# Altium PCB 2012_BALISE_CONNECTIQUE_FILLE.PCBDOC
Units mm, origin at the board's own origin, x right, y up, seen from the top; angles counter-clockwise.
Board outline 40 x 37 mm, 4 copper layers (1-TOP, 2-Signal, 3-GND, 4-BOT); 17 components, 14 nets, 57 pads, 29 vias.
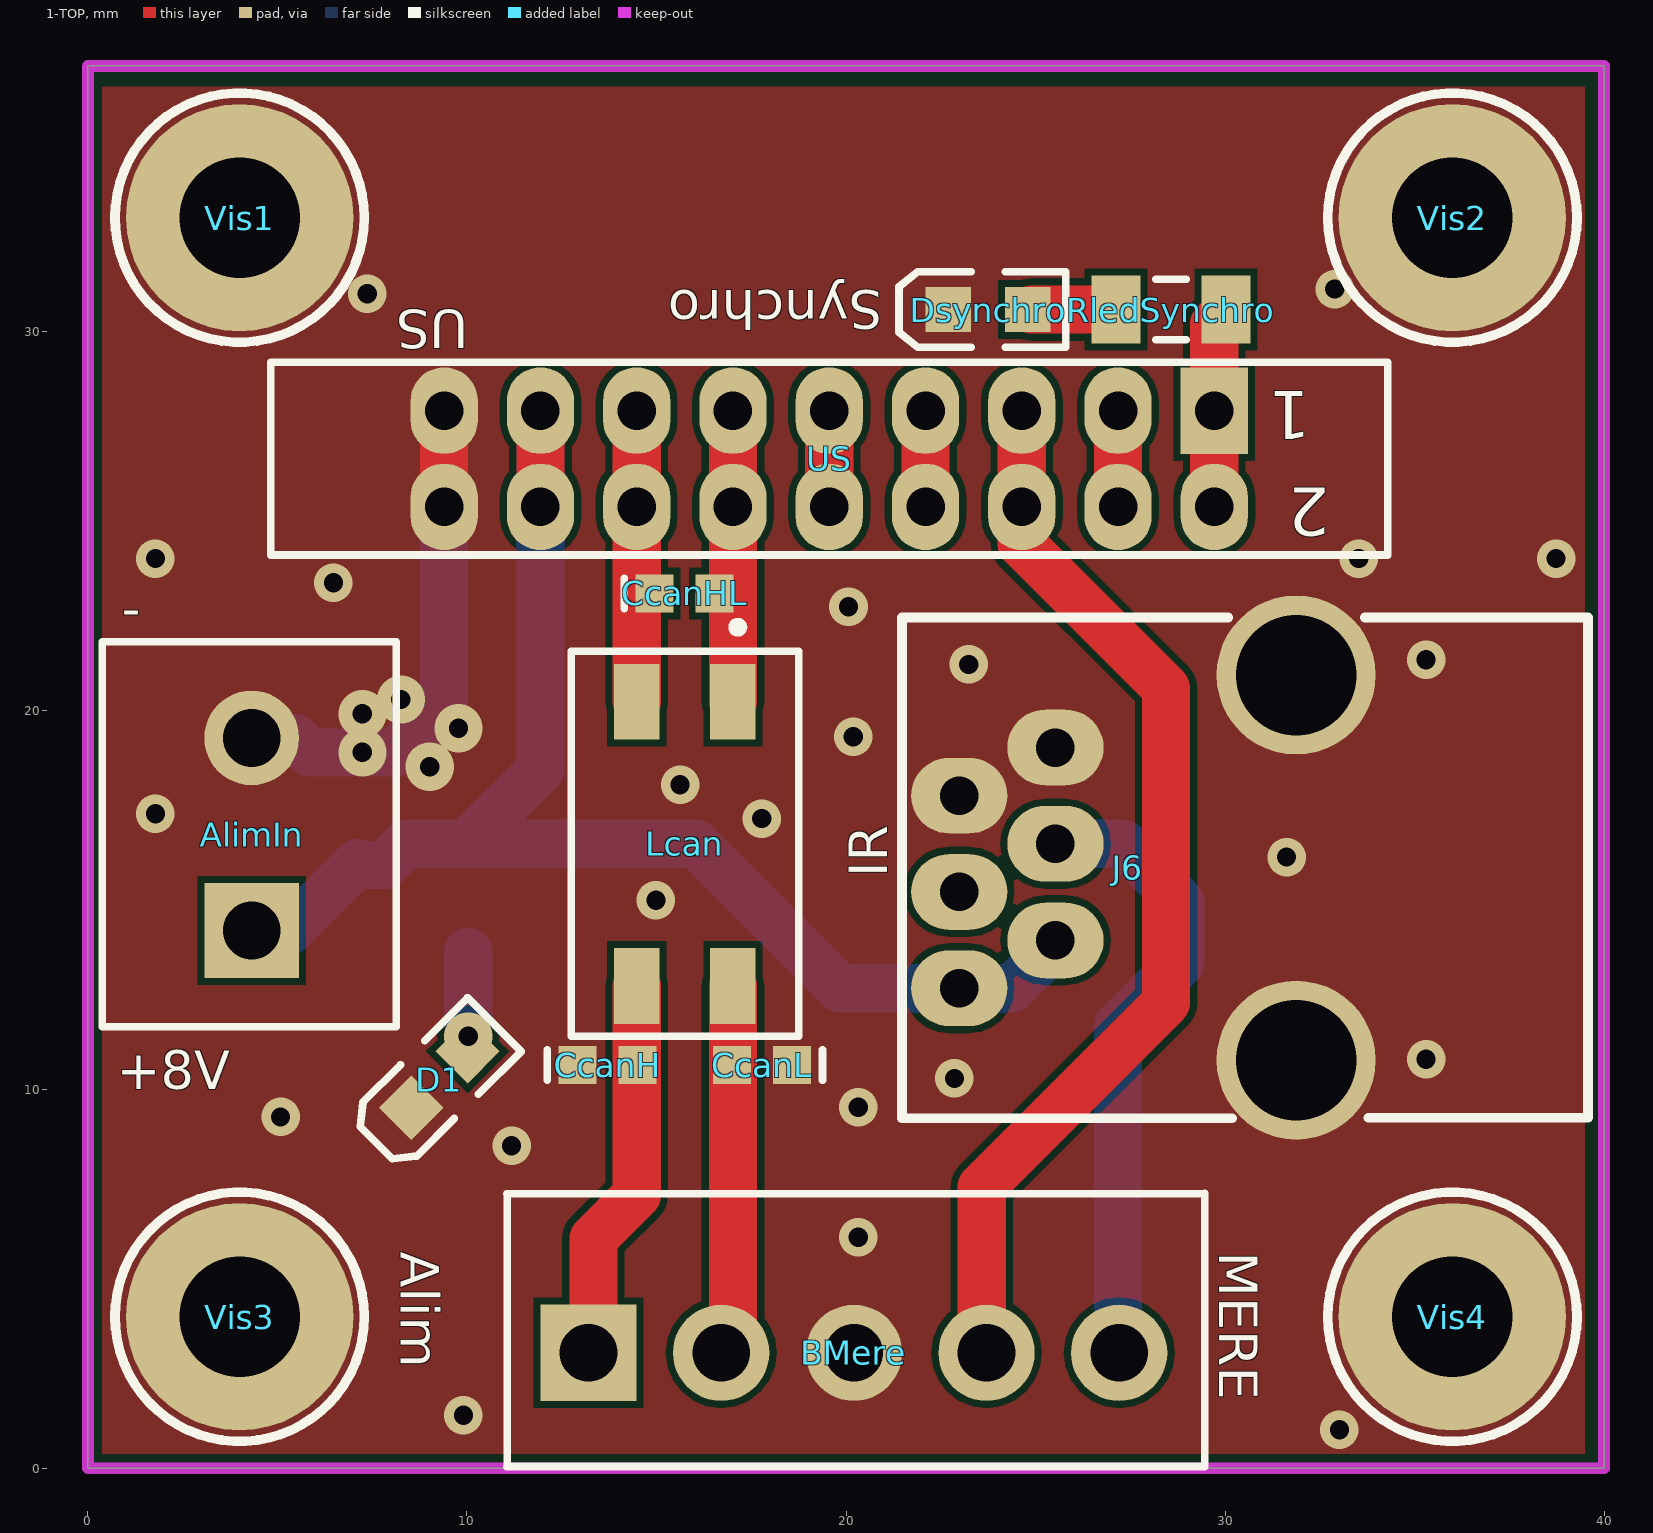
[diagram p0: 1-TOP view]
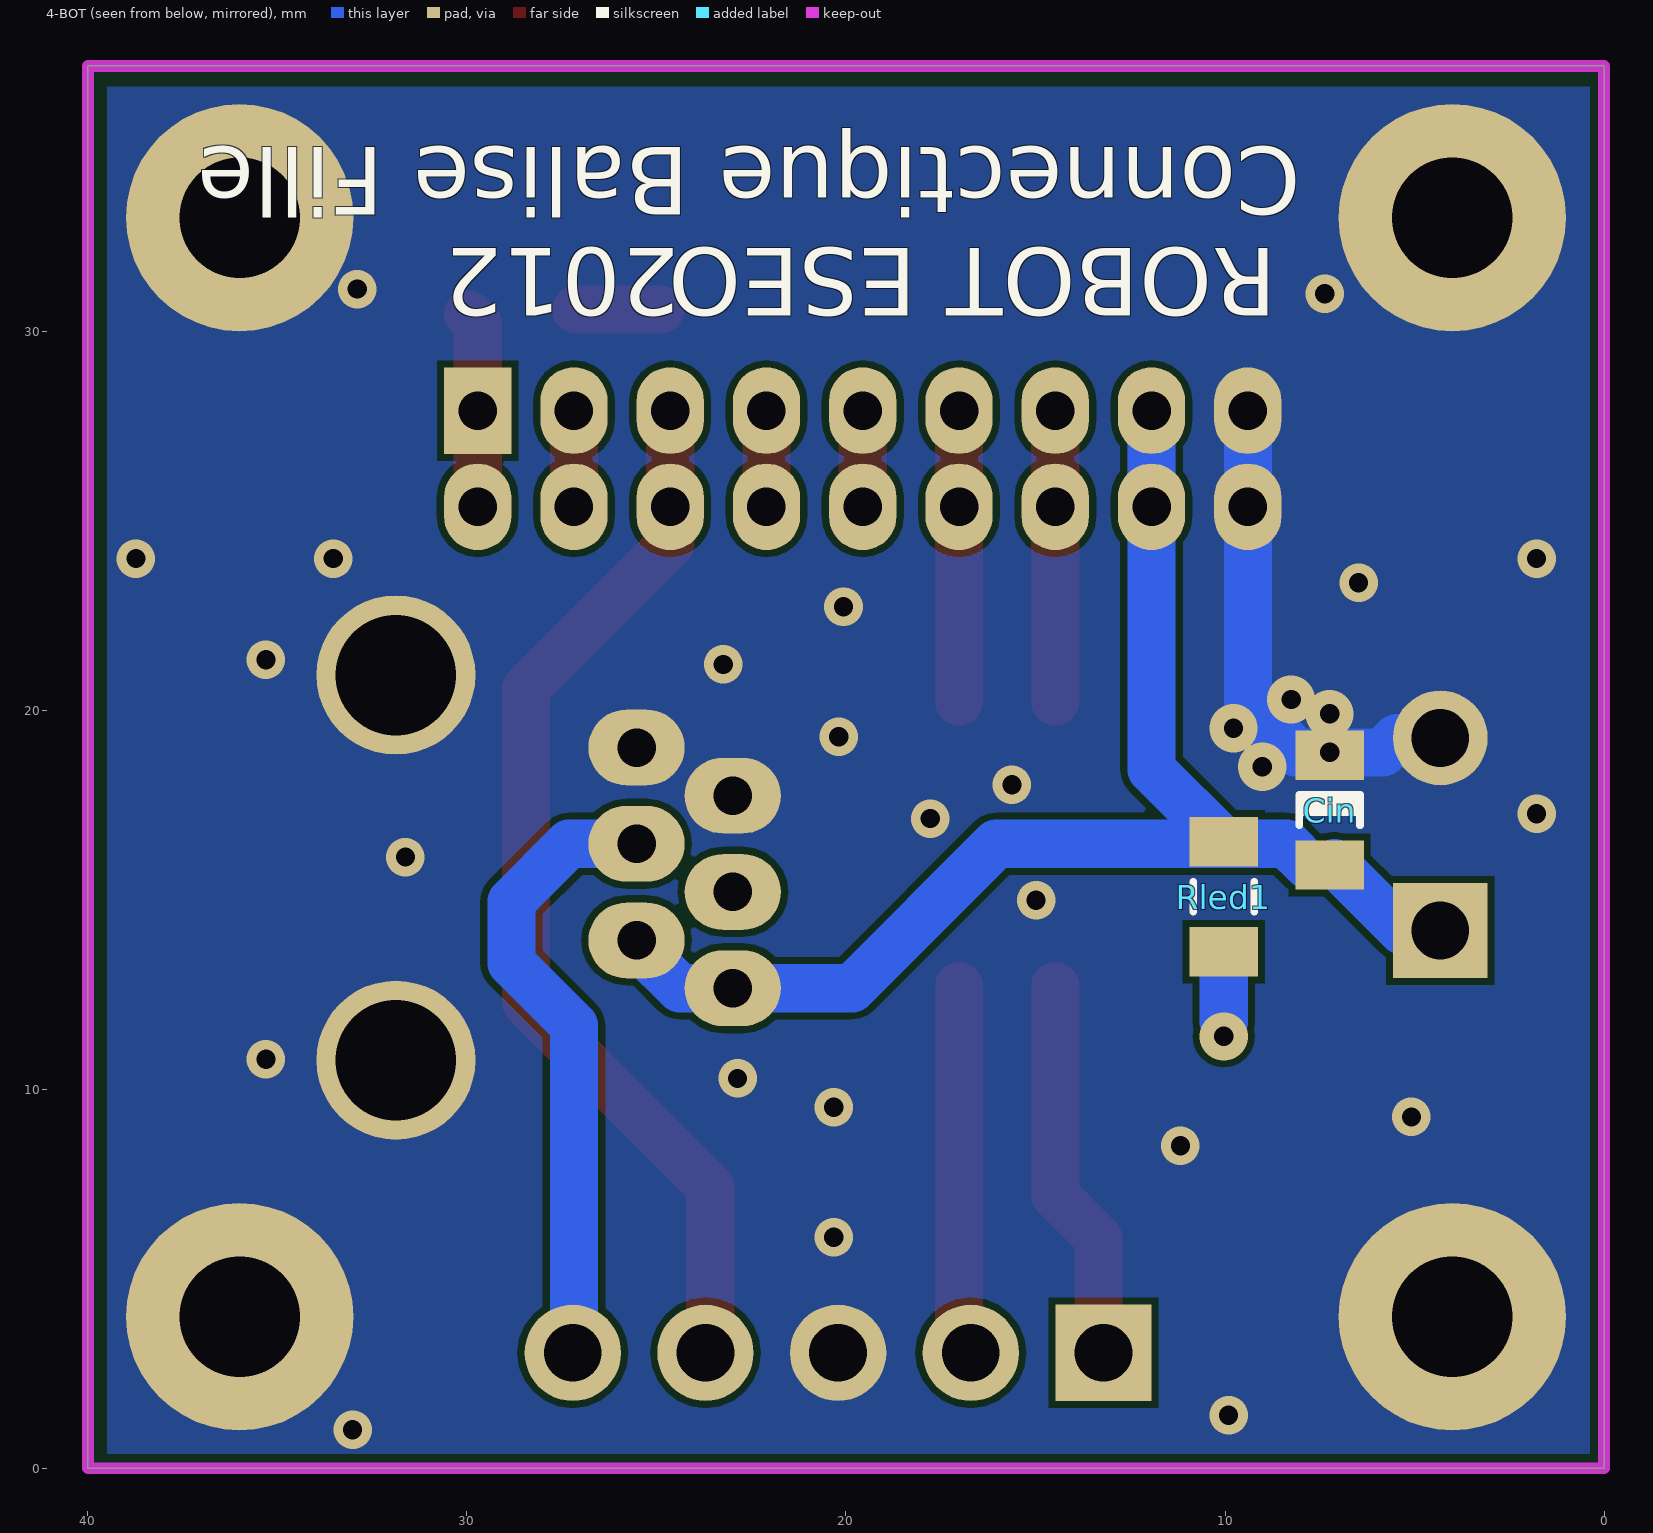
[diagram p1: 4-BOT view, seen from below]
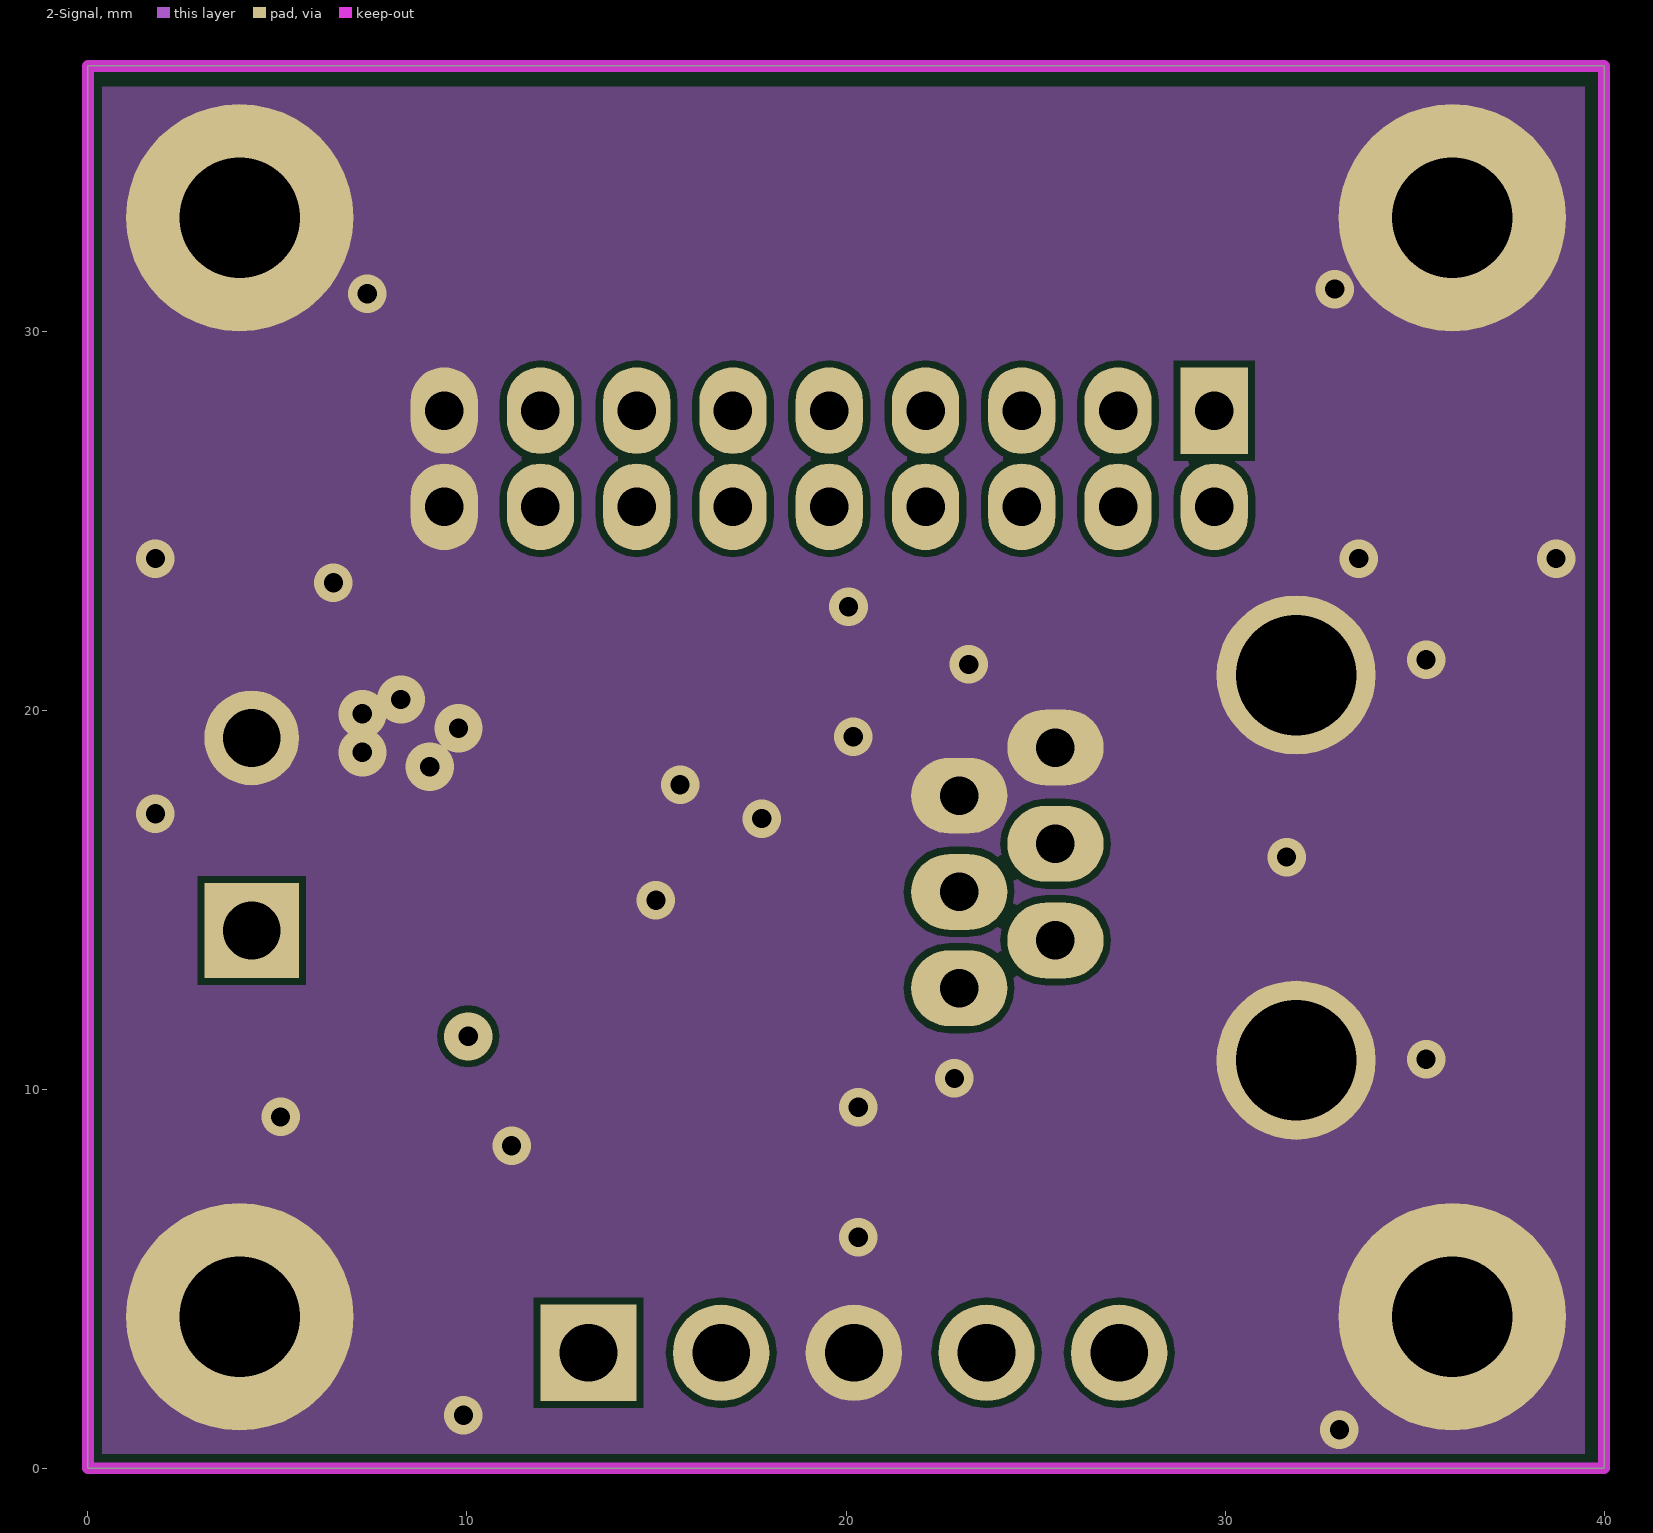
[diagram p2: 2-Signal]
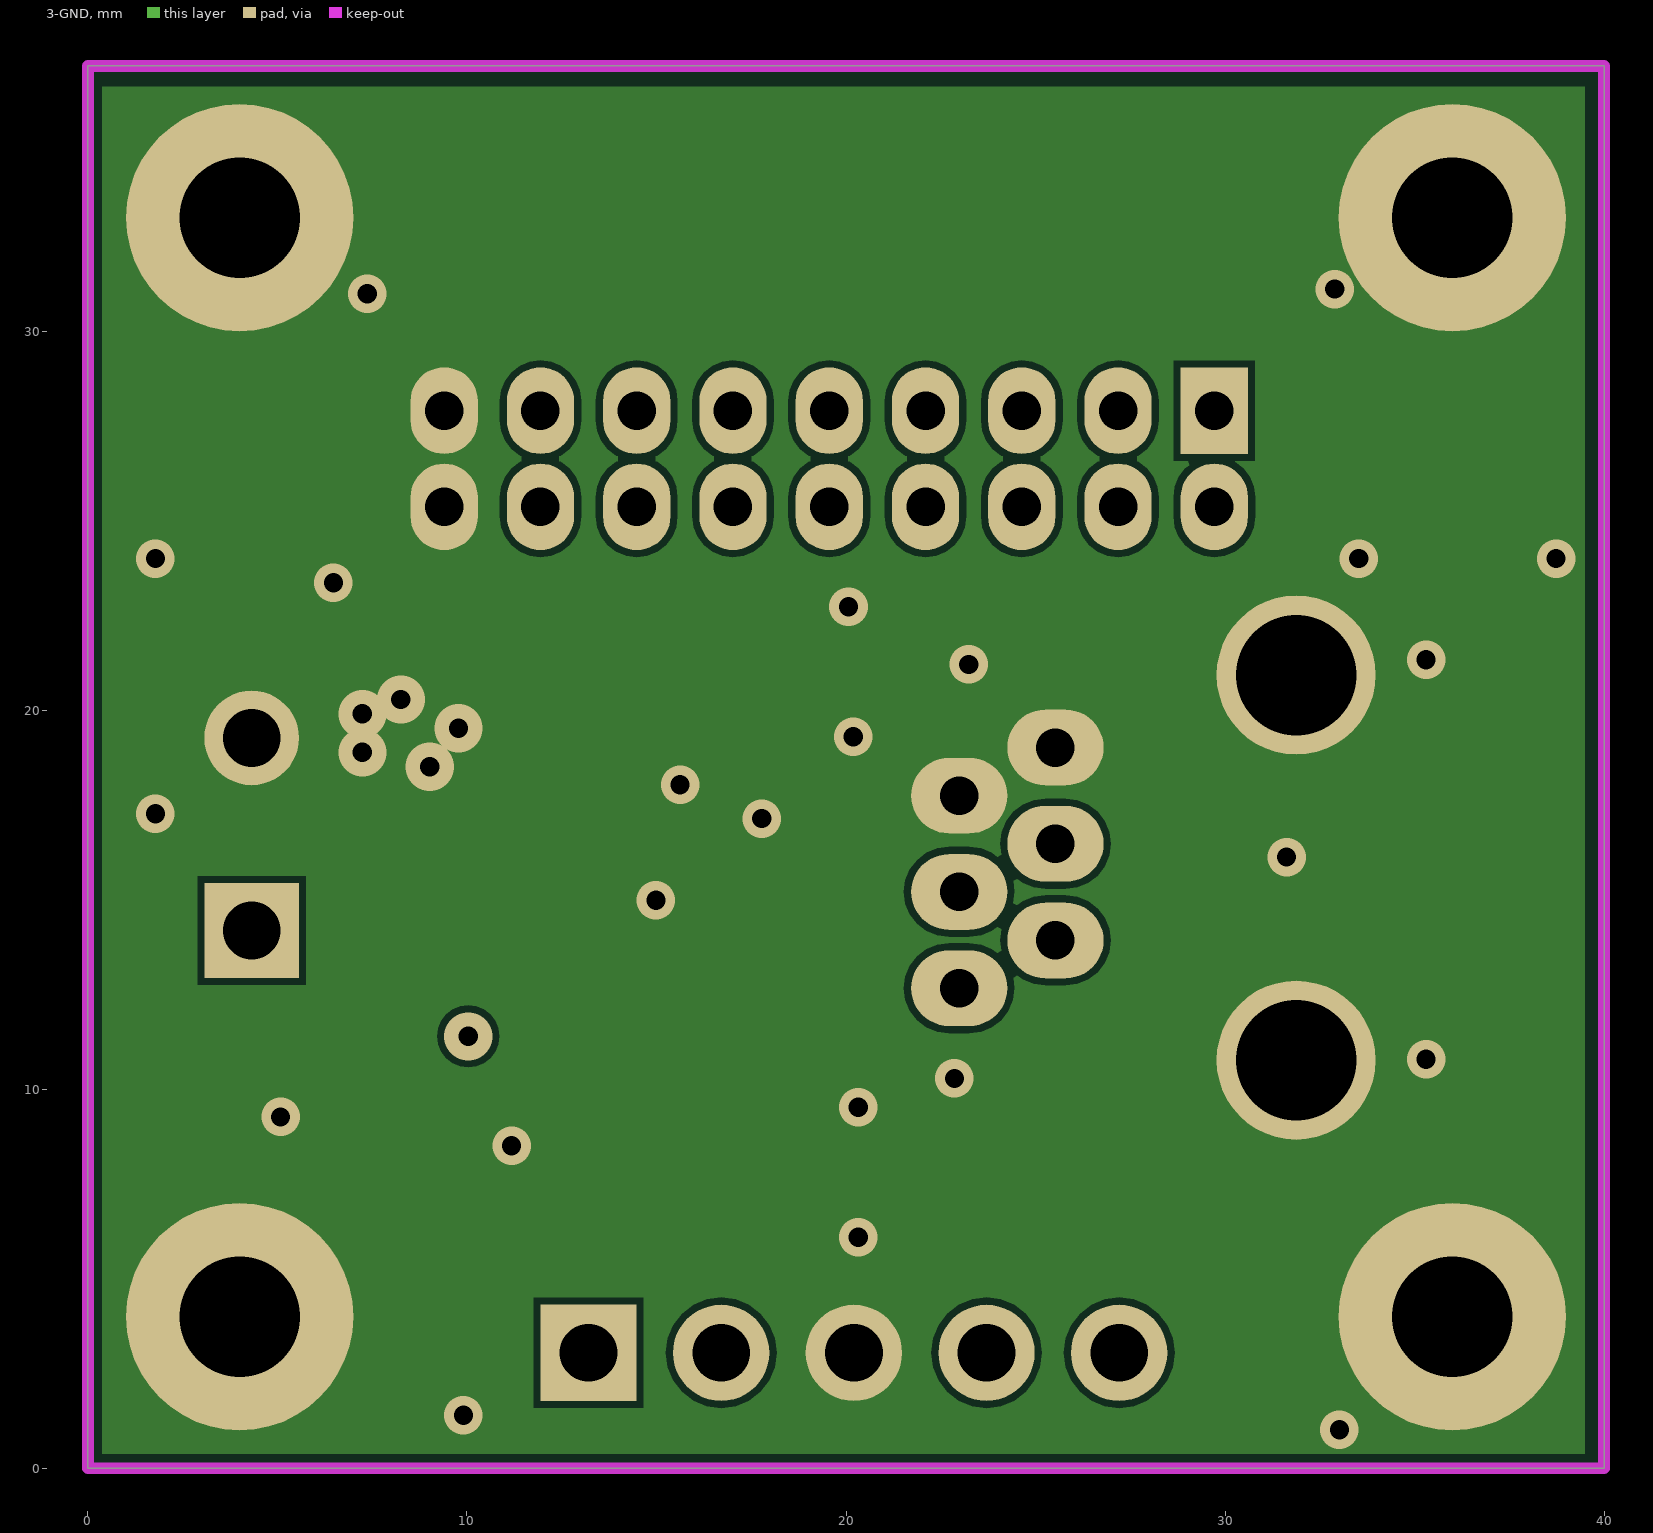
[diagram p3: 3-GND]
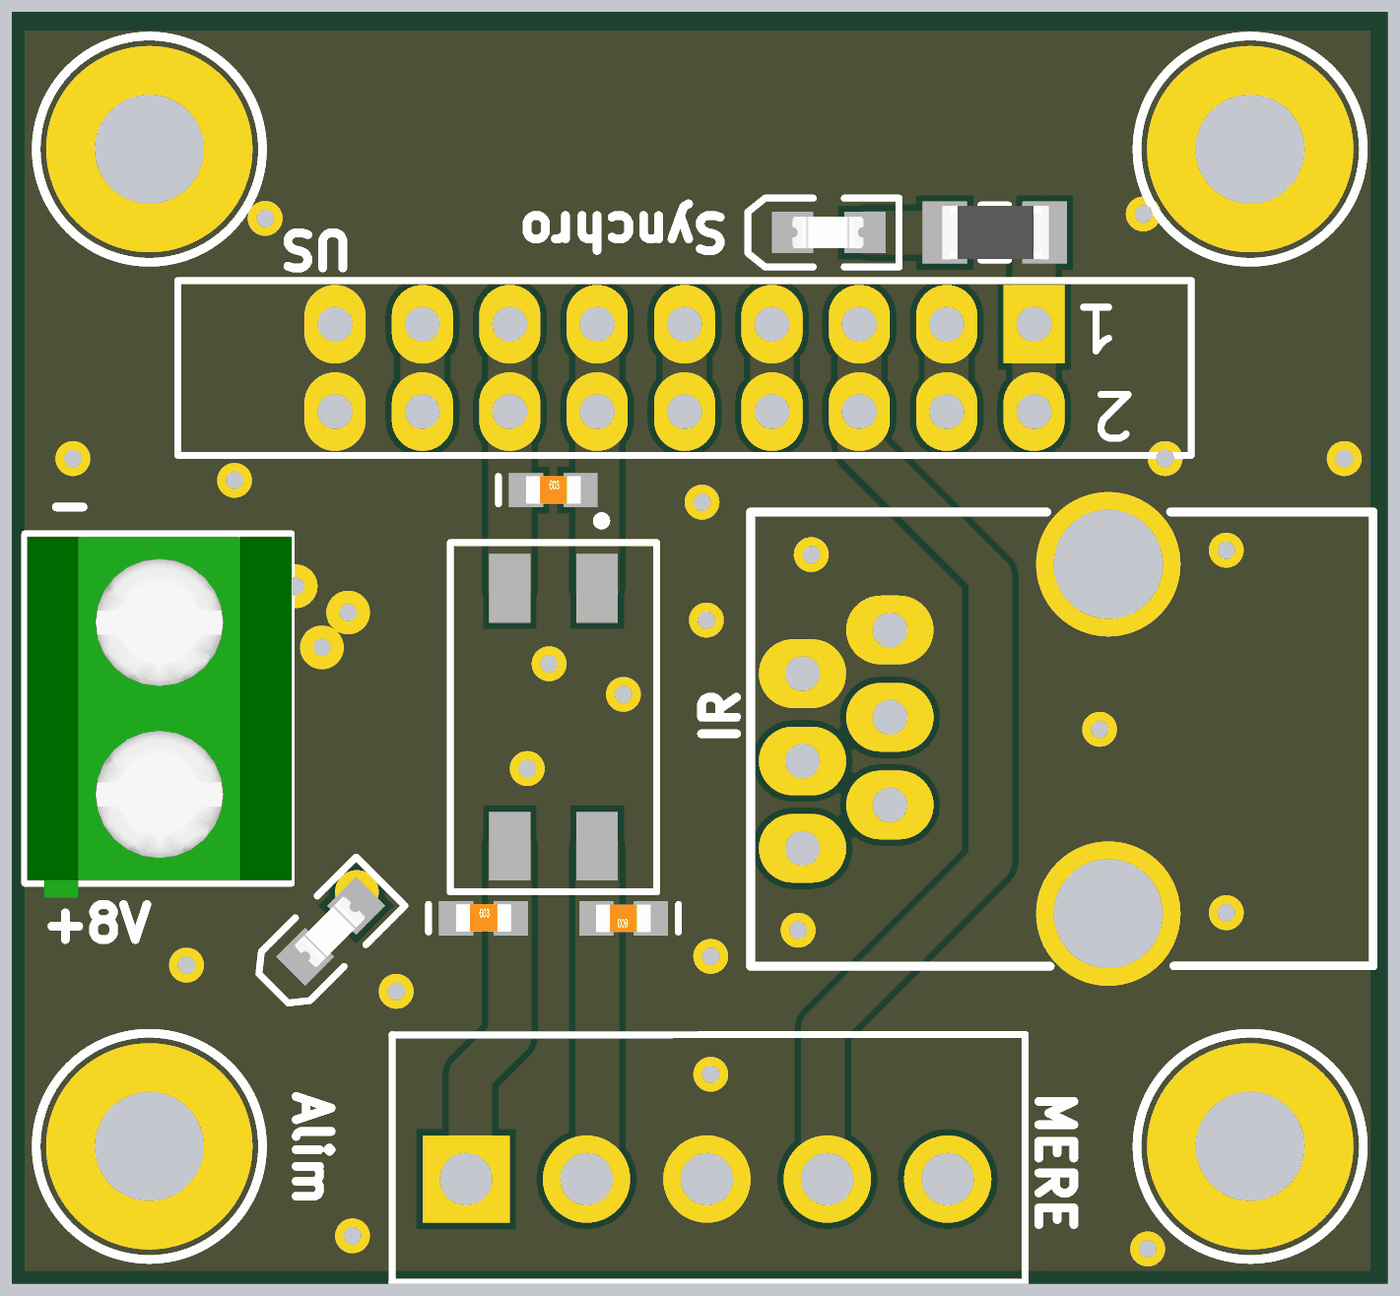
[diagram p4: 3D render of the assembled board from above, using the file's embedded part models]

## Layer stack, top to bottom
1-TOP: signal copper 0.0356
Dielectric: core 0.32, FR-4, Dk 4.8
2-Signal: signal copper 0.0356
Dielectric: prepreg 0.32, FR-4, Dk 4.8
3-GND: signal copper 0.0356
Dielectric: core 0.32, FR-4, Dk 4.8
4-BOT: signal copper 0.0356

## Board outline
0,0 40,0 40,37 0,37

## Design rules (kind name [scope] priority, off if disabled: settings)
Clearance [All] p1: gap=0.178
FabricationTestPointUsage TestPointUsage [All] p1: valid=0 allowmultiple=FALSE
FabricationTestpoint Testpoint [(IsPad And (OnTopLayer Or OnBottomLayer))] p1: side=3 testpointundercomponent=TRUE minsize=1.016 maxsize=2.54 preferedsize=1.524 minholesize=0 maxholesize=1.016 preferedholesize=0.813 testpointgrid=0.025 allowsidetop=TRUE allowsidebottom=TRUE usegrid=TRUE gridtolerance=0
PlaneConnect [All] p1: planeconnectstyle=Direct reliefexpansion=0.635 reliefentries=4 reliefconductorwidth=0.305 reliefairgap=0.381
PolygonConnect [All] p1: connectstyle=Direct reliefconductorwidth=0.254 reliefentries=4 polygonreliefangle="90 Angle"
RoomDefinition 2012_BALISE_CONNECTIQUE_FILLE [InComponentClass('2012_BALISE_CONNECTIQUE_FILLE')] p1: confinementstyle=ConfineIn formatcopy=TRUE lockcomponents=FALSE outline 59.731,0 66.843,0 66.843,9.652 59.731,9.652
RoutingLayers RoutingLayers_1 [All] p1: top layer_v5=TRUE mid layer 1_v5=FALSE mid layer 2_v5=FALSE bottom layer_v5=TRUE
RoutingLayers [All] p2: top layer_v5=TRUE mid layer 1_v5=FALSE mid layer 2_v5=FALSE bottom layer_v5=TRUE
RoutingVias [All] p1: holewidth=0.61 width=1.27 viastyle="Through Hole" minholewidth=0.61 minwidth=1.27 maxholewidth=0.61 maxwidth=1.27
SilkscreenOverComponentPads [All] p1: minsilkscreentomaskgap=0.254
SolderMaskExpansion [All] p1: expansion=0
Width ALIM [InNet('0') Or InNet('VDD')] p1: maxlimit=2.54 minlimit=0.254 preferedwidth=0.635
Width [All] p2: maxlimit=3.81 minlimit=0.127 preferedwidth=0.406
23 further rules are at their usual default settings.

## Components (designator, comment, footprint, x,y, rotation, side; value= is the part's Value field where it differs from the comment)
AlimIn "Bornier 2-Pin" "Bornier_2_pas 5.08mm" 4.318,14.192 r90 top
BMere "Header 5" HDR1X5 13.208,3.048 r0 top
CcanH "100pF_50V" C0603_N 13.716,10.636 r0 top
CcanHL "120pF_50V" C0603_N 15.748,23.082 r0 top
CcanL "100pF_50V" C0603_N 17.78,10.636 r180 top
Cin "10uF" C1206_N 7.239,17.367 r270 bottom
D1 "LED" LED_0805 9.271,10.255 r225 top
Dsynchro "LED" LED_0805 23.749,30.575 r180 top
J6 "IR" RJ11_6/6 22.987,17.748 r0 top
Lcan "2x51uH" "Self de mode commun Wurth Elektronik WE-SL2" 15.748,16.478 r270 top
Rled1 "1K" R1206_N 10.033,15.081 r90 bottom
RledSynchro "1K" R1206_N 28.575,30.575 r0 top
US "Header 9X2" HDR2X9 29.718,27.908 r180 top
Vis1 "Pad_M3" M3x6mm 4,33 r0 top
Vis2 "Pad_M3" M3x6mm 36,33 r0 top
Vis3 "Pad_M3" M3x6mm 4,4 r0 top
Vis4 "Pad_M3" M3x6mm 36,4 r0 top

## Footprints (in the part's own frame and the unit in brackets; to place one, negate y for a bottom-side part, rotate by r counter-clockwise, add the part's x,y. Pads: shape width x height; smd on the part's side, far side on the other; paste and mask are expansions set on the pad)
"Bornier_2_pas 5.08mm" [mm]
  rect 2.5x2.5 hole 1.524: 1(0,0)
  round 2.5 hole 1.524: 2(5.08,0)
  silkscreen extent -2.54,-3.81 7.62,3.94, body extent -2.96,-3.82 7.54,3.88, height 10
C0603_N [mm] "Chip Capacitor, Body 1.6x0.8mm, IPC Medium Density"
  rect 1x1 smd: 1(-0.8,0) 2(0.787,0)
  silkscreen extent -1.6,-0.4 -1.6,0.4, body extent -0.8,-0.39 0.8,0.41, height 0.32
C1206_N [mm] "Chip Capacitor, Body 3.2x1.6mm, IPC Medium Density"
  rect 1.3x1.8 smd: 1(-1.45,0) 2(1.45,0)
  silkscreen extent -0.4,-0.8 0.4,0.8, body extent -1.57,-0.81 1.63,0.79, height 1.02
HDR1X5 [mil] "Connector; Header; 5 Position"
  rect 100x100 hole 60: 1(0,0)
  round 100 hole 60: 2(137.8,0) 3(275.59,0) 4(413.39,0) 5(551.18,0)
  silkscreen extent -85,-118 640,165
HDR2X9 [mil] "Connector; Header; 9x2 Position"
  rect 70x90 hole 40: 1(0,0)
  oval 70x90 hole 40: 2(0,100) 3(100,0) 4(100,100) 5(200,0) 6(200,100) 7(300,0) 8(300,100) 9(400,0) 10(400,100) 11(500,0) 12(500,100) 13(600,0) 14(600,100) 15(700,0) 16(700,100) 17(800,0) 18(800,100)
  silkscreen extent -180,-50 980,150
LED_0805 [mm] "SM LED; 2 Flat Leads"
  rect 1.2x1.2 smd: 1(-1.05,0) 2(1.05,0)
  silkscreen extent -2.05,-1 2.35,1, body extent -1.43,-1.46 1.48,1.45, height 1.2
M3x6mm [mm] "Vis M3 X 6mm"
  round 6 hole 3.175: 1(0,0)
  silkscreen extent -3.29,-3.28 3.29,3.28
R1206_N [mm] "Chip Resistor, Body 3.2x1.6mm, IPC Medium Density"
  rect 1.3x1.8 smd: 1(-1.45,0) 2(1.45,0)
  silkscreen extent -0.4,-0.8 0.4,0.8, body extent -1.68,-0.87 1.68,0.87, height 0.71
RJ11_6/6 [mm] "Connector; RJ11; 6P/6C; Low Profil; Right Angle; Pin Spacing=2.54mm"
  oval 2.54x2 hole 1.016: 1(0,-5.08) 2(2.54,-3.82) 3(0,-2.54) 4(2.54,-1.27) 5(0,0) 6(2.54,1.27)
  round 4.2 hole 3.175: FIX1(8.89,3.18) FIX2(8.89,-6.98)
  silkscreen extent -1.51,-8.51 16.59,4.7
"Self de mode commun Wurth Elektronik WE-SL2" [mm] "Self de mode commun Wurth Elektronik WE-SL2"
  rect 2x1.2 smd: 1(-3.75,-1.27) 2(-3.75,1.27) 3(3.75,1.27) 4(3.75,-1.27)
  silkscreen extent -5.84,-3 5.08,3, body extent -4.6,-3 4.6,3, height 5

## Part data
BMere: "Header, 5-Pin"
CcanH CcanHL CcanL Cin: library part Capacitor, "Capacitor"
D1 Dsynchro: "Typical LED"
J6: library part CONNECTEUR_RJ12
Lcan: library part "Self de mode commun WE-744220", "Self de mode commun, Wurth Elektronik, WE-SL2"
Rled1 RledSynchro: library part Resistor, "Resistor"
US: "Header, 9-Pin, Dual row"
Vis1 Vis2 Vis3 Vis4: library part "Vis M3 X 6mm _TORX_Tête 6mm", "Vis M3 X 6mm _TORX_Tête 6mm"

## Via types
v1: diameter 1.016, hole 0.508, 1-TOP to 4-BOT, 23 vias
v2: diameter 1.27, hole 0.508, 1-TOP to 4-BOT, 6 vias

## Nets (pads, with @x,y where several pads share a name; then routed paths per layer and width w, separated by ;. In a path a pad name is that pad's centre, name@x,y a point inside that pad or via, vN(x,y) a via of type N, cw(c..) or ccw(c..) an arc to the next point about the centre after c; other vN are vias at no path point)
CAN_H: CcanHL.1 Lcan.1 US.13 US.14 | length 7.7
  1-TOP w1.27: Lcan.1 US.14 US.13
CAN_H_BUS: BMere.1 CcanH.2 Lcan.4 | length 10.7
  1-TOP w1.27: BMere.1@13.335,2.54 13.335,6.064 14.478,7.207 Lcan.4
CAN_L: CcanHL.2 Lcan.2 US.11 US.12 | length 7.7
  1-TOP w1.27: Lcan.2 US.12 US.11
CAN_L_BUS: BMere.2 CcanL.2 Lcan.3 | length 9.9
  1-TOP w1.27: BMere.2@17.018,2.794 Lcan.3
GND: AlimIn.2 BMere.3 CcanH.1 CcanL.1 Cin.1 D1.2 Dsynchro.2 J6.5 J6.6 J6.FIX1 J6.FIX2 US.17 US.18 Vis1.1 Vis2.1 Vis3.1 Vis4.1 | length 15.9
  1-TOP w1.27: US.18 US.17
  4-BOT w1.27: AlimIn.2 5.461,19.272 5.842,18.891 8.128,18.891 9.398,20.161 US.18 US.17@9.398,27.781
  other v1: 33.02,1.016 9.906,1.397 20.32,6.096 11.176,8.509 5.08,9.271 20.32,9.525 22.86,10.287 35.306,10.795 14.986,14.986 31.623,16.129 17.78,17.145 1.778,17.272 15.621,18.034 20.193,19.304 23.241,21.209 35.306,21.336 20.066,22.733 6.477,23.368 1.778,24.003 33.528,24.003 38.735,24.003 7.366,30.988 32.893,31.115
  other v2: 9.017,18.51 7.239,18.891 9.779,19.526 7.239,19.907 8.255,20.288
IR: BMere.5 J6.4 | length 16
  4-BOT w1.27: J6.4@25.908,16.478 27.305,16.478 28.829,14.954 28.829,13.335 27.178,11.684 BMere.5@27.178,3.175
NetD1_1: D1.1 Rled1.1 | length 1.9
  4-BOT w1.27: v2@10.033,11.779 Rled1.1
  other v2: 10.033,11.398
NetDsynchro_1: Dsynchro.1 RledSynchro.1 | length 2.2
  1-TOP w1.27: Dsynchro.1@24.892,30.575 RledSynchro.1
PU2TX: RledSynchro.2 US.1 US.2 | length 5.2
  1-TOP w1.27: US.2 US.1 29.718,30.194 RledSynchro.2@29.972,30.448
SYNCHRO: BMere.4 US.5 US.6 | length 28.8
  1-TOP w1.27: BMere.4@23.581,2.667 23.581,7.42 28.448,12.287 28.448,20.574 24.638,24.384 US.6 US.5
U1RX_C: US.9 US.10 | length 2.5
  1-TOP w1.27: US.10 US.9
U1TX_C: US.7 US.8 | length 2.5
  1-TOP w1.27: US.8 US.7
U2RX: US.3 US.4 | length 2.5
  1-TOP w1.27: US.4 US.3
VCC: AlimIn.1 Cin.2 J6.1 J6.2 Rled1.2 US.15 US.16 | length 38.5
  1-TOP w1.27: US.16 US.15
  4-BOT w1.27: AlimIn.1 5.334,14.192 Cin.2@7.112,15.97 ; Cin.2 7.821,15.917 8.382,16.478 16.034,16.478 19.844,12.668 J6.1 24.384,12.668 J6.2@25.4,13.684 ; Rled1.2 11.938,18.436 US.16 US.15@11.938,27.781
pads on no net: J6.3

## Polygon pours and split planes (outlines as drawn)
GND on 4-BOT "4-GND" (solid, pour order 1003): 0.381,0.381 39.878,0.381 39.497,0.381 39.497,36.449 0.381,36.449
GND on 3-GND "3-GND" (solid, pour order 1002): 0.381,0.381 39.878,0.381 39.497,0.381 39.497,36.449 0.381,36.449
GND on 2-Signal "2-GND" (solid, pour order 1001): 0.381,0.381 39.878,0.381 39.497,0.381 39.497,36.449 0.381,36.449
GND on 1-TOP "1-TOP-GND" (solid, pour order 1000): 0.381,0.381 39.878,0.381 39.497,0.381 39.497,36.449 0.381,36.449

## Keep-outs
Keep-Out Layer:
  the board outline again, w0.305

## Silkscreen, mask and mechanical layers (free items; w line width, h text height)
Top Overlay:
  text "Synchro" at 20.955,31.083 h1.02 r180
  text "US" at 10.033,30.575 h1.02 r180
  text "-" at 0.889,22.193 h1.02
  text "IR" at 21.082,15.589 h1.02 r90
  text "+8V" at 0.762,10.001 h1.02
  text "Alim" at 8.255,5.715 h1.02 r270
  text "MERE" at 29.845,5.715 h1.02 r270
Bottom Overlay:
  text "Connectique Balise Fille" at 8.001,35.433 h3.05 r180
  text "ROBOT ESEO" at 8.636,32.766 h3.05 r180
  text "2012" at 24.384,32.766 h3.05 r180

## Dimensions
4,4 to 0,0 on Mechanical 15
4,4 to 0,0 on Mechanical 15
0,0 to 40,0 on Mechanical 15
0,0 to 0,37 on Mechanical 15
36,33 to 40,37 on Mechanical 15
36,33 to 40,37 on Mechanical 15

## Text inside footprints (layer, text, board x,y; h text height)
US: Top Overlay "1" at 32.258,28.416 h1.27 r180; Top Overlay "2" at 32.766,25.876 h1.27 r180